# Altium PCB H_BRIDGE_Driver.PcbDoc
Units mm, origin at the board's own origin, x right, y up, seen from the top; angles counter-clockwise.
Board outline 92 x 91 mm, 2 copper layers (Top Layer, Bottom Layer); 21 components, 13 nets, 61 pads, 188 vias.
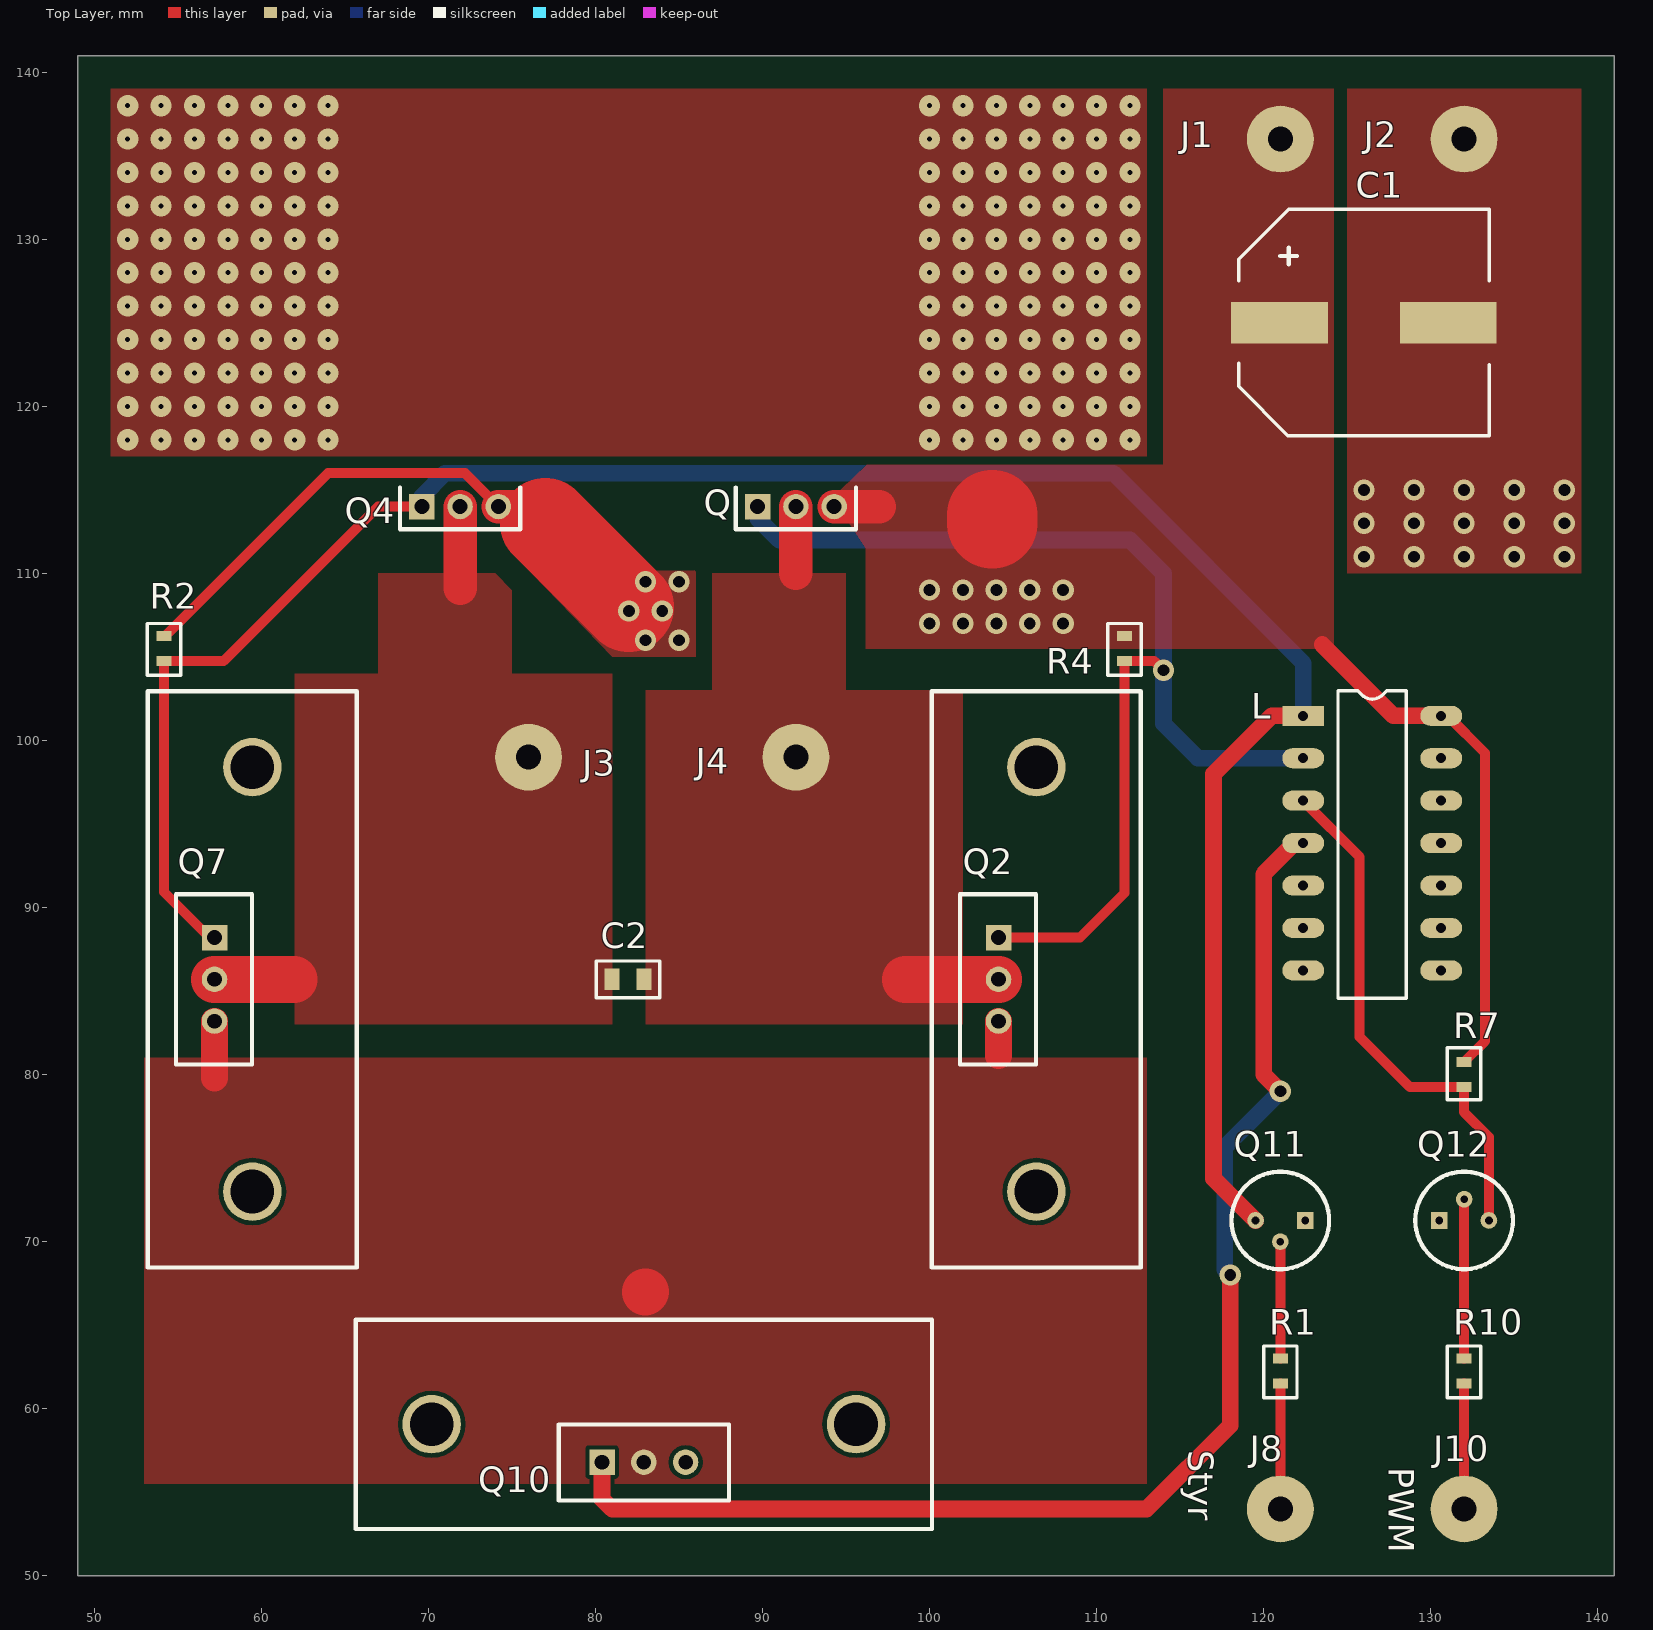
[diagram p0: Top Layer view]
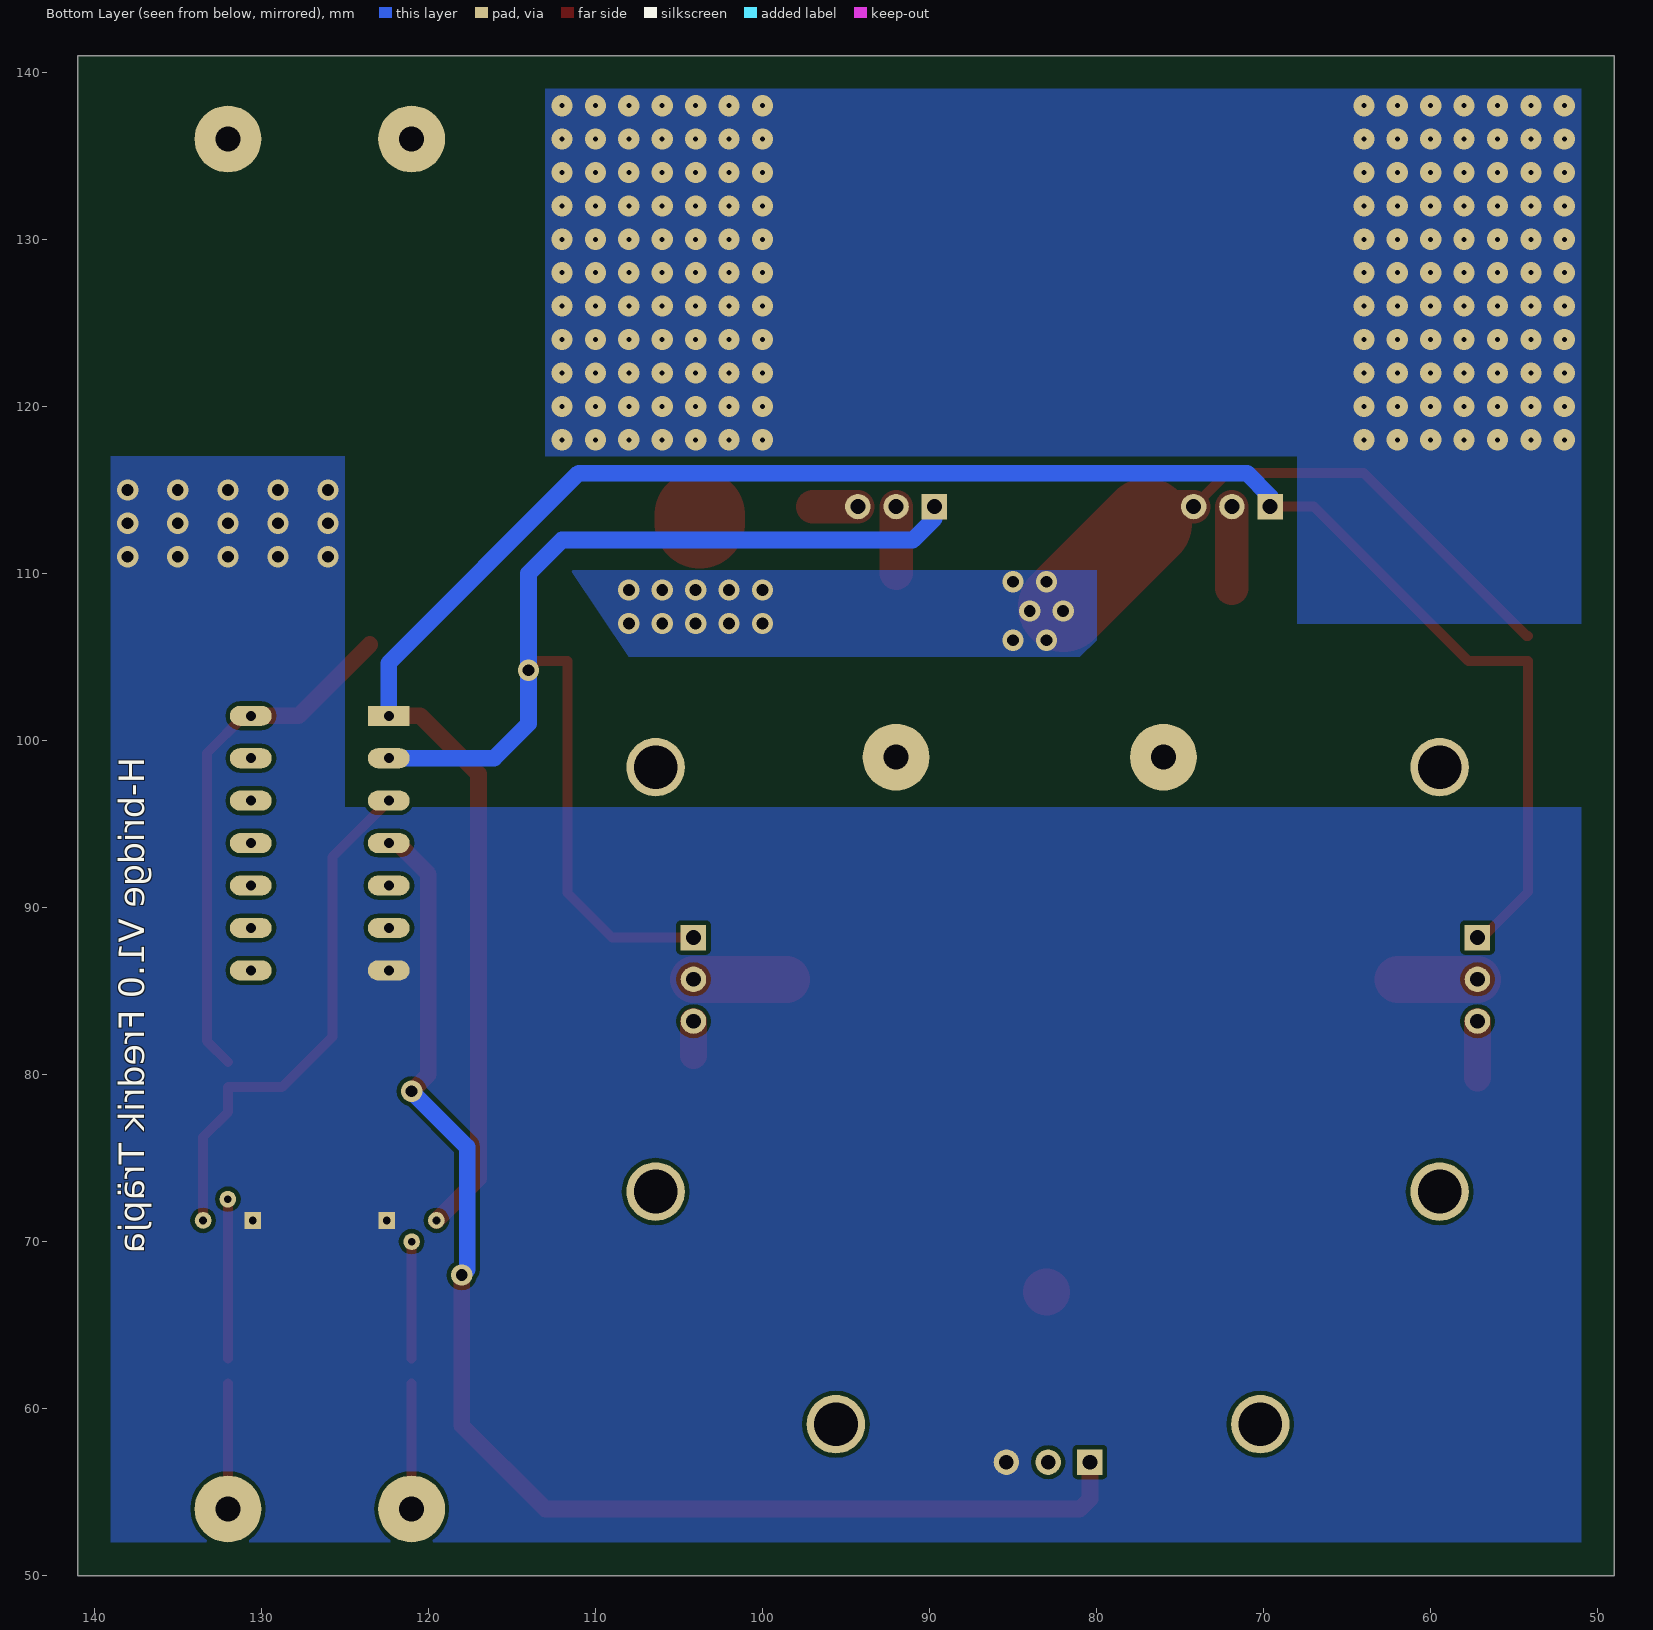
[diagram p1: Bottom Layer view, seen from below]
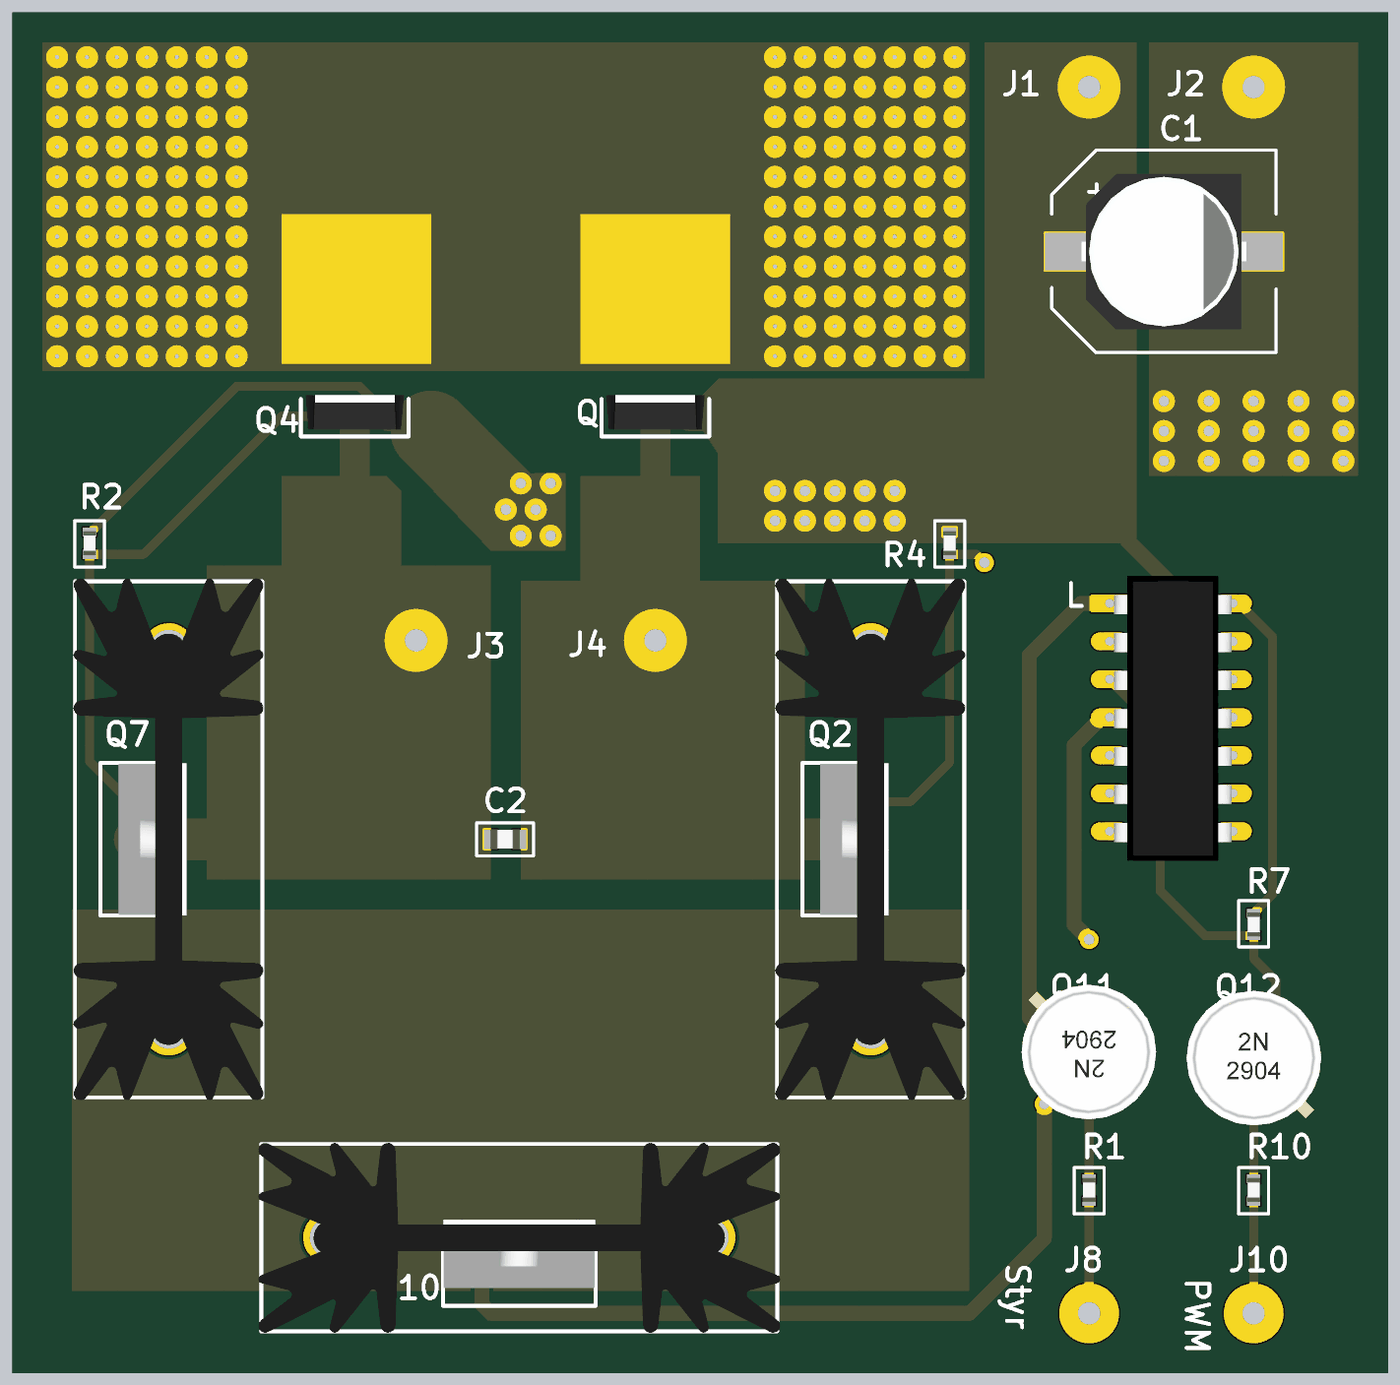
[diagram p2: 3D render of the assembled board from above, using the file's embedded part models]

## Layer stack, top to bottom
Top Solder: solder mask 0.0102, Solder Resist, Dk 3.5
Top Layer: signal copper 0.0356
Dielectric 1: dielectric 0.32, FR-4, Dk 4.8
Bottom Layer: signal copper 0.0356
Bottom Solder: solder mask 0.0102, Solder Resist, Dk 3.5

## Board outline
49,50 141,50 141,141 49,141

## Design rules (kind name [scope] priority, off if disabled: settings)
Clearance [All] p1: gap=0.254 ignorepadtopadclearanceinfootprint=FALSE except(0: Arc-Hole Track-Hole SMDPad-Hole THPad-Hole Via-Hole Fill-Hole Poly-Hole Region-Hole Text-Hole)
HoleSize [All] p1: absolutevalues=TRUE maxlimit=6 minlimit=0.3 maxpercent=80.000 minpercent=20.000
PlaneConnect [All] p1: planeconnectstyle=Direct reliefexpansion=0.508 reliefentries=4 reliefconductorwidth=0.254 reliefairgap=0.254
PolygonConnect [All] p1: connectstyle=Direct reliefconductorwidth=0.254 reliefentries=4 polygonreliefangle="90 Angle" airgapwidth=0.254
RoutingVias [All] p1: holewidth=0.711 width=1.27 viastyle="Through Hole" minholewidth=0.711 minwidth=1.27 maxholewidth=0.711 maxwidth=1.27
SolderMaskExpansion [All] p1: expansion=0.102
Width [All] p1: maxlimit=10 minlimit=0.254 preferedwidth=0.254
28 further rules are at their usual default settings.

## Components (designator, comment, footprint, x,y, rotation, side; value= is the part's Value field where it differs from the comment)
C1 "1000uFSMD" SMDaliminium-elektrolyt 126,125 r0 top locked
C2 "1uFSMD" C0805 81.95,85.7 r0 top locked
J1 "Pad" PAD_WITH_HOLE_4MMx1.5MM 121,136 r0 top
J2 "Pad" PAD_WITH_HOLE_4MMx1.5MM 132,136 r0 top
J3 "Pad" PAD_WITH_HOLE_4MMx1.5MM 76,99 r0 top
J4 "Pad" PAD_WITH_HOLE_4MMx1.5MM 92,99 r0 top
J8 "Pad" PAD_WITH_HOLE_4MMx1.5MM 121,54 r0 top
J10 "Pad" PAD_WITH_HOLE_4MMx1.5MM 132,54 r0 top
L "INV_HEX" DIP14 122.37,101.477 r0 top locked
Q "FQU11P06" I-PAK 92,114 r90 top locked
Q2 "IRF630" TO-220WithHeatSink 104.13,88.2 r0 top locked
Q4 "FQU11P06" I-PAK 71.9,114 r90 top locked
Q7 "IRF630" TO-220WithHeatSink 57.2,88.2 r0 top locked
Q10 "IRF630" TO-220WithHeatSink 80.4,56.8 r90 top locked
Q11 "2N2222" BJT2N2222 121,70 r180 top locked
Q12 "2N2222" BJT2N2222 132,72.54 r0 top locked
R1 "2.2Kohm0603" R0603 121,62.25 r90 top locked
R2 "10Kohm0603" R0603 54.173,105.5 r90 top locked
R4 "10Kohm0603" R0603 111.677,105.5 r90 top locked
R7 "10Kohm0603" R0603 132,80 r270 top
R10 "2.2Kohm0603" R0603 132,62.25 r90 top locked

## Footprints (in the part's own frame and the unit in brackets; to place one, negate y for a bottom-side part, rotate by r counter-clockwise, add the part's x,y. Pads: shape width x height; smd on the part's side, far side on the other; paste and mask are expansions set on the pad)
BJT2N2222 [mm]
  rect 1x1 hole 0.46: 1(-1.485,-1.27)
  round 1 hole 0.46: 2(0,0) 3(1.485,-1.27)
  silkscreen extent -2.92,-4.19 2.92,1.65, body extent -4.49,-5.97 4.51,3.03, height 6.5
C0805 [mm]
  rect 0.9x1.3 smd: 1(-0.95,0) 2(0.95,0)
  silkscreen extent -1.9,-1.1 1.9,1.1, body extent -1,-0.65 1,0.66, height 0.73
DIP14 [mm]
  rect 2.5x1.2 hole 0.6: 1(0,0)
  oval 2.5x1.2 hole 0.6: 2(0,-2.54) 3(0,-5.08) 4(0,-7.62) 5(0,-10.16) 6(0,-12.7) 7(0,-15.24) 8(8.26,-15.24) 9(8.26,-12.7) 10(8.26,-10.16) 11(8.26,-7.62) 12(8.26,-5.08) 13(8.26,-2.54) 14(8.26,0)
  silkscreen extent 2.08,-16.9 6.18,1.5, body extent 0.3,-17.22 8.17,1.82, height 4.19
I-PAK [mil]
  rect 60x60 hole 35.04: 1(0,90.16)
  round 60 hole 35.04: 2(0,0) 3(0,-90.16)
  silkscreen extent -54,-142 45,142, body extent -35,-130 55,130, height 372
PAD_WITH_HOLE_4MMx1.5MM [mm]
  round 4 hole 1.5: 1(0,0)
R0603 [mm]
  rect 0.6x0.9 smd: 1(-0.75,0) 2(0.75,0)
  silkscreen extent -1.6,-1 1.5,1, body extent -0.8,-0.43 0.8,0.43, height 0.48
SMDaliminium-elektrolyt [mm]
  rect 5.8x2.5 smd: 1(-5.05,0) 2(5.05,0)
  silkscreen extent -7.5,-6.75 7.5,6.8, body extent -5.5,-5.2 5.5,5.2, height 10.41
TO-220WithHeatSink [mm]
  rect 1.524x1.524 hole 0.88: 1(0,0)
  round 1.524 hole 0.88: 2(0,-2.5) 3(0,-5)
  round 3.5 hole 2.61: 4(2.27,-15.2) 4(2.27,10.2)
  silkscreen extent -4,-19.75 8.52,14.75, body extent -4.1,-19.95 8.6,14.95, height 25.4

## Part data
C1: library part 865060462010, "WURTH ELEKTRONIK         865060462010             SMD Aluminium Electrolytic Capacitor, Radial Can - SMD, 1000 F, 25 V, WCAP-ASLL Series", Capacitance=1000µF, ESR (Equivalent Series Resistance)=-, Lifetime @ Temp.="5000 Hrs @ 105°C", Manufacturer="Würth Elektronik (Wuerth Elektronik)", Operating Temperature="-55°C ~ 105°C", Package / Case="Radial, Can - SMD", Ripple Current="1.15A @ 100kHz", Standard Package=200, Supplier Part Number 1=2466212RL, Tolerance=±20%, Voltage Rating=25V, Applications="General Purpose", Category=Capacitors, ComponentLink1Description=http://www.farnell.com/datasheets/1880055.pdf, ComponentLink1URL=http://www.farnell.com/datasheets/1880055.pdf, ComponentLink2Description=http://katalog.we-online.de/pbs/datasheet/865060462010.pdf, ComponentLink2URL=http://katalog.we-online.de/pbs/datasheet/865060462010.pdf, Family="Aluminum Capacitors", Height - Seated (Max)="0.551\" (14.00mm)", Impedance="66 mOhm", Lead Spacing=-, Manufacturer Part Number=865060462010, Mounting Type="Surface Mount", Online Catalog="WCAP-ASLL Series", Other Names=732-8539-2, Packaging="Tape &amp; Reel (TR)", Polarization=Polar, Pricing 1="1=1.79, 3=1.63, 5=1.5, 10=1.3, 20=1.11, 50=0.964, 250=0.767, 500=0.683 (EUR)", Series=WCAP-ASLL, Size / Dimension="0.492\" Dia (12.50mm)", Stock 1=240, Supplier 1=Farnell, Surface Mount Land Size="0.531\" L x 0.531\" W (13.50mm x 13.50mm)"
C2: library part 0805F105Z250CT, "Cap Ceramic 1uF 25V Y5V -20% to 80% SMD 0805 85C Plastic T/R", Capacitance="1000000 pF", Case Style="Ceramic Chip", Manufacturer="Walsin Technologies", Operating Temp Range="-25C to 85C", Package / Case=0805, Supplier Part Number 1=2496996, Temp Coeff (Dielectric)=Y5V, Tolerance (+ or -)="-20% to 80%", Voltage=25VDC, ComponentLink1Description=https://datasheet.ciiva.com/26831/getdatasheetpartid-747373-26831419.pdf, ComponentLink1URL=https://datasheet.ciiva.com/26831/getdatasheetpartid-747373-26831419.pdf, Construction="SMT Chip", Failure Rate="Not Required", Manufacturer Part Number=0805F105Z250CT, Mounting Style="Surface Mount", Packaging="Tape and Reel", Pricing 1="10=0.0398, 100=0.0282, 250=0.0175, 750=0.0146, 1500=0.0109 (GBP)", Product Depth (mm)="1.25 mm", Product Diameter (mm)="Not Required mm", Product Height (mm)="1.25 mm", Product Length (mm)="2 mm", Rad Hardened=No, Stock 1=81660, Supplier 1=Farnell, Wire Form="Not Required"
J1 J2 J3 J4 J8 J10: library part Hole
L: library part CD40106BE, "IC, HEX INVERTER, 4000 CMOS, 16DIP", Manufacturer="Texas Instruments (TI)", Maximum High Level Output Current="-4.2(Min) mA", Maximum Low Level Output Current="4.2(Min) mA", Operating Temperature="-55 to 125 °C", Package=14PDIP, Supplier Part Number 1=1106097, Typical Operating Supply Voltage="3.3|5|9|12|15 V", Typical Quiescent Current="0.04 uA", Category="Inverter Schmitt Trigger", ComponentLink1Description=https://datasheet.ciiva.com/31393/83-0482-v1-31393479.pdf, ComponentLink1URL=https://datasheet.ciiva.com/31393/83-0482-v1-31393479.pdf, ComponentLink2Description=https://datasheet.ciiva.com/14134/cd40106b-eng-tds-14134554.pdf, ComponentLink2URL=https://datasheet.ciiva.com/14134/cd40106b-eng-tds-14134554.pdf, ComponentLink3Description=https://datasheet.ciiva.com/15089/getdatasheetpartid-83071-15089178.pdf, ComponentLink3URL=https://datasheet.ciiva.com/15089/getdatasheetpartid-83071-15089178.pdf, ComponentLink4Description=https://datasheet.ciiva.com/27050/893179-27050663.pdf, ComponentLink4URL=https://datasheet.ciiva.com/27050/893179-27050663.pdf, ComponentLink5Description=https://datasheet.ciiva.com/4827/schs097d-127287-4827216.pdf, ComponentLink5URL=https://datasheet.ciiva.com/4827/schs097d-127287-4827216.pdf, ComponentLink6Description=https://datasheet.ciiva.com/29138/174319-da-01-en-cmos-ic-cd-40106-be-dip14-tid-29138613.pdf, ComponentLink6URL=https://datasheet.ciiva.com/29138/174319-da-01-en-cmos-ic-cd-40106-be-dip14-tid-29138613.pdf, ComponentLink7Description=https://datasheet.ciiva.com/1626/1833362-1626124.pdf, ComponentLink7URL=https://datasheet.ciiva.com/1626/1833362-1626124.pdf, ComponentLink8Description=https://datasheet.ciiva.com/26228/cd40106b-mil-26228764.pdf, ComponentLink8URL=https://datasheet.ciiva.com/26228/cd40106b-mil-26228764.pdf, ComponentLink9Description=https://datasheet.ciiva.com/1508/1707951-1508125.pdf, ComponentLink9URL=https://datasheet.ciiva.com/1508/1707951-1508125.pdf, ComponentLink10Description=https://datasheet.ciiva.com/7783/1833362-7783095.pdf, ComponentLink10URL=https://datasheet.ciiva.com/7783/1833362-7783095.pdf, ComponentLink11Description=https://datasheet.ciiva.com/14290/cd40106b-mil-14290377.pdf, ComponentLink11URL=https://datasheet.ciiva.com/14290/cd40106b-mil-14290377.pdf, ComponentLink12Description=https://datasheet.ciiva.com/1866/cd40106b-1866363.pdf, ComponentLink12URL=https://datasheet.ciiva.com/1866/cd40106b-1866363.pdf, Fabrication Technology=CMOS, Input Type="Schmitt Trigger", Logic Family=CD4000, Logic Function="Inverter Schmitt Trigger", Manufacturer Part Number=CD40106BE, Maximum Propagation Delay Time @ Maximum CL="280@5V|140@10V|120@15V ns", Number of Elements per Chip=6, Output Type="Schmitt Trigger", Packaging="Rail / Tube", Pricing 1="1=0.49, 10=0.405, 100=0.22, 250=0.218, 500=0.217, 900=0.146, 3000=0.143, 9000=0.131 (EUR)", Propagation Delay Test Condition="50 pF", Rad Hard=No, Stock 1=22628, Supplier 1=Farnell
Q Q4: "FAIRCHILD SEMICONDUCTOR         FQU11P06            MOSFET Transistor, P Channel, 9.4 A, 60 V, 185 mohm, -10 V, -4 V", Continuous drain current=9.4A, Drain to Source on-state resistance=185@10VmOhm, Drain to Source voltage=60V, Manufacturer="Fairchild Semiconductor", Package=IPAK, Supplier Part Number 1=9846166, ComponentLink1Description=http://www.farnell.com/datasheets/1796811.pdf, ComponentLink1URL=http://www.farnell.com/datasheets/1796811.pdf, Field-effect transistor type=Enhancement, Manufacturer Part Number=FQU11P06, Pricing 1="1=0.814, 25=0.698, 100=0.548 (EUR)", Stock 1=3144, Supplier 1=Farnell
Q2 Q7 Q10: "MOSFET N-CH 200V 9A TO-220", Alternate Case Style=SOT-78B, Capacitance Ciss Typ=540pF, Continuous Drain Current Id=9A, Current Temperature=25°C, Drain Source Voltage Vds=200V, Manufacturer=STMicroelectronics, On Resistance Rds(on)=400mohm, Operating Temperature Max=150°C, Operating Temperature Min=-65°C, Operating Temperature Range="-65°C to +150°C", Package / Case=TO-220, Power Dissipation Pd=100W, Pulse Current Idm=36A, Rds(on) Test Voltage Vgs=10V, Supplier Part Number 1=2144993, Threshold Voltage Vgs Typ=3V, Voltage Vgs th Max=4V, Voltage Vgs th Min=2V, ComponentLink1Description=https://datasheet.ciiva.com/27746/47-0290-27746871.pdf, ComponentLink1URL=https://datasheet.ciiva.com/27746/47-0290-27746871.pdf, ComponentLink2Description=https://datasheet.ciiva.com/29324/155772-da-01-en-mosfet-irf630-stm-29324203.pdf, ComponentLink2URL=https://datasheet.ciiva.com/29324/155772-da-01-en-mosfet-irf630-stm-29324203.pdf, ComponentLink3Description=https://datasheet.ciiva.com/15193/getdatasheetpartid-84724-15193131.pdf, ComponentLink3URL=https://datasheet.ciiva.com/15193/getdatasheetpartid-84724-15193131.pdf, ComponentLink4Description=https://datasheet.ciiva.com/16290/cd00000701-16290285.pdf, ComponentLink4URL=https://datasheet.ciiva.com/16290/cd00000701-16290285.pdf, ComponentLink5Description=https://datasheet.ciiva.com/938/cd00000701-938548.pdf, ComponentLink5URL=https://datasheet.ciiva.com/938/cd00000701-938548.pdf, ComponentLink6Description=https://datasheet.ciiva.com/7643/1689784-7643063.pdf, ComponentLink6URL=https://datasheet.ciiva.com/7643/1689784-7643063.pdf, ComponentLink7Description=https://datasheet.ciiva.com/46382/1689784-46382250.pdf, ComponentLink7URL=https://datasheet.ciiva.com/46382/1689784-46382250.pdf, Current Id Max=9A, Full Power Rating Temperature=25°C, Lead Spacing=2.54mm, Manufacturer Part Number=IRF630, MSL="(Not Applicable)", No. of Pins=3, No. of Transistors=1, On State resistance @ Vgs = 10V=400mohm, Pin Configuration=a, Pin Format="1G, (2+Tab)D, 3S", Pricing 1="1=1.17, 10=0.95, 100=0.73, 500=0.65, 1000=0.51, 5000=0.49 (EUR)", Reverse Recovery Time trr Typ=170ns, Stock 1=245, Supplier 1=Farnell, SVHC="No SVHC (19-Dec-2012)", Transistor Case Style=TO-220, Transistor Polarity="N Channel", Voltage Vds Typ=200V, Voltage Vgs Max=3V, Voltage Vgs Rds on Measurement=10V
Q11 Q12: "MULTICOMP         2N2222             Bipolar (BJT) Single Transistor, NPN, 30 V, 500 mW, 800 mA, 100 hFE", Collector Emitter Voltage V(br)ceo=30V, Collector Emitter Voltage Vces=400mV, Continuous Collector Current Ic Max=800mA, Current Ic @ Vce Sat=150mA, DC Current Gain hFE=100, Full Power Rating Temperature=25°C, Manufacturer=Multicomp, Package / Case=TO-18, Power Dissipation Pd=500mW, Supplier Part Number 1=9206884, Voltage Vcbo=60V, ComponentLink1Description=https://datasheet.ciiva.com/1400/1524377-1400202.pdf, ComponentLink1URL=https://datasheet.ciiva.com/1400/1524377-1400202.pdf, ComponentLink2Description=https://datasheet.ciiva.com/1259/296640-1259843.pdf, ComponentLink2URL=https://datasheet.ciiva.com/1259/296640-1259843.pdf, ComponentLink3Description=https://datasheet.ciiva.com/1194/1662272-1194081.pdf, ComponentLink3URL=https://datasheet.ciiva.com/1194/1662272-1194081.pdf, Current Ic Continuous a Max=800mA, Current Ic hFE=150mA, DC Collector Current=800mA, Gain Bandwidth ft Min=250MHz, Gain Bandwidth ft Typ=250MHz, Hfe Min=100, Manufacturer Part Number=2N2222, No. of Pins=3, No. of Transistors=1, Pin Configuration=a, Power Dissipation Ptot Max=500mW, Pricing 1="1=1.45, 25=0.795, 100=0.737, 500=0.293, 1000=0.214, 2000=0.189, 7000=0.187, 20000=0.185 (EUR)", Stock 1=79208, Supplier 1=Farnell, SVHC="No SVHC (19-Dec-2012)", Transistor Case Style=TO-18, Transistor Polarity=NPN
R1 R10: library part RC0603FR-072K2L, "RES SMD 2.2K OHM 1% 1/10W 0603", Case Code - in=0603, Case Code - mm=1608, Manufacturer=Yageo, Operating Temperature Range="- 55 C to + 155 C", Power Rating="100 mW", Resistance="2.2 kOhms", Supplier Part Number 1=9238522, Temperature Coefficient="100 PPM / C", Tolerance="1 %", Voltage Rating="50 V", ComponentLink1Description=https://datasheet.ciiva.com/7746/1738695-7746315.pdf, ComponentLink1URL=https://datasheet.ciiva.com/7746/1738695-7746315.pdf, ComponentLink2Description=https://datasheet.ciiva.com/2453/pyu-r-int-thick-7-2453945.pdf, ComponentLink2URL=https://datasheet.ciiva.com/2453/pyu-r-int-thick-7-2453945.pdf, ComponentLink3Description=https://datasheet.ciiva.com/46394/443971-46394958.pdf, ComponentLink3URL=https://datasheet.ciiva.com/46394/443971-46394958.pdf, ComponentLink4Description=https://datasheet.ciiva.com/7746/1738695-7746316.pdf, ComponentLink4URL=https://datasheet.ciiva.com/7746/1738695-7746316.pdf, ComponentLink5Description=https://datasheet.ciiva.com/2453/pyu-r-int-thick-7-2453943.pdf, ComponentLink5URL=https://datasheet.ciiva.com/2453/pyu-r-int-thick-7-2453943.pdf, ComponentLink6Description=https://datasheet.ciiva.com/46440/1868787-46440902.pdf, ComponentLink6URL=https://datasheet.ciiva.com/46440/1868787-46440902.pdf, ComponentLink7Description=https://datasheet.ciiva.com/2453/pyu-r-int-thick-7-2453944.pdf, ComponentLink7URL=https://datasheet.ciiva.com/2453/pyu-r-int-thick-7-2453944.pdf, ComponentLink8Description=https://datasheet.ciiva.com/7660/1868787-7660791.pdf, ComponentLink8URL=https://datasheet.ciiva.com/7660/1868787-7660791.pdf, Manufacturer Part Number=RC0603FR-072K2L, Packaging=Reel, Pricing 1="10=0.0079, 300=0.0068, 500=0.0059, 1250=0.0048, 2500=0.004 (EUR)", Product="Thick Film Resistors General Purpose", Series=RC, Stock 1=73325, Supplier 1=Farnell, Termination Style=SMD/SMT
R2 R4 R7: library part RC0603FR-0710KL, "YAGEO         RC0603FR-0710KL             RES, THICK FILM, 10K, 1%, 0.1W, 0603", Case Code - in=0603, Case Code - mm=1608, Manufacturer=Yageo, Operating Temperature Range="- 55 C to + 155 C", Package / Case="0603 (1608 metric)", Power Rating="100 mW", Resistance="10 kOhms", Supplier Part Number 1=9238603, Temperature Coefficient="100 PPM / C", Tolerance="1 %", Voltage Rating="75 V", Brand=Yageo, ComponentLink1Description=https://datasheet.ciiva.com/7983/443971-7983596.pdf, ComponentLink1URL=https://datasheet.ciiva.com/7983/443971-7983596.pdf, ComponentLink2Description=https://datasheet.ciiva.com/7746/1738695-7746239.pdf, ComponentLink2URL=https://datasheet.ciiva.com/7746/1738695-7746239.pdf, ComponentLink3Description=https://datasheet.ciiva.com/22747/443971-22747519.pdf, ComponentLink3URL=https://datasheet.ciiva.com/22747/443971-22747519.pdf, ComponentLink4Description=https://datasheet.ciiva.com/7660/38590-7660789.pdf, ComponentLink4URL=https://datasheet.ciiva.com/7660/38590-7660789.pdf, ComponentLink5Description=https://datasheet.ciiva.com/15189/getdatasheetpartid-409289-15189591.pdf, ComponentLink5URL=https://datasheet.ciiva.com/15189/getdatasheetpartid-409289-15189591.pdf, ComponentLink6Description=https://datasheet.ciiva.com/46440/1868787-46440891.pdf, ComponentLink6URL=https://datasheet.ciiva.com/46440/1868787-46440891.pdf, Height="0.45 mm", Length="1.6 mm", Manufacturer Part Number=RC0603FR-0710KL, Packaging=Reel, Pricing 1="10=0.0082, 300=0.007, 500=0.0061, 1250=0.0049, 2500=0.0041 (EUR)", Product="Thick Film Resistors General Purpose", Product Category="Thick Film Resistors", RoHS=True, Series=RC, Stock 1=328031, Supplier 1=Farnell, Termination Style=SMD/SMT, Type="General Purpose Chip Resistor Surface Mount", Unit Weight="0.000071 oz", Width="0.8 mm"

## Via types
v1: diameter 1.27, hole 0.3, Top Layer to Bottom Layer, 154 vias
v2: diameter 1.27, hole 0.711, Top Layer to Bottom Layer, 34 vias

## Nets (pads, with @x,y where several pads share a name; then routed paths per layer and width w, separated by ;. In a path a pad name is that pad's centre, name@x,y a point inside that pad or via, vN(x,y) a via of type N, cw(c..) or ccw(c..) an arc to the next point about the centre after c; other vN are vias at no path point)
GND: C1.2 J2.1 L.7 Q10.3 Q11.1 Q12.1 | length 1.8
  Bottom Layer w0.254: L.7@122.485,86.122 L.7 L.7@122.737,86.237 ; J2.1@131.1,135.1 J2.1
  other v2: 126,111 129,111 132,111 135,111 138,111 126,113 129,113 132,113 135,113 138,113 126,115 129,115 132,115 135,115 138,115
INV1: L.1 Q4.1 Q7.1 Q11.3 R2.1 | length 133.6
  Top Layer w0.6: Q7.1 56.9,88.2 54.173,90.927 R2.1 57.75,104.75 67,114 Q4.1
  Top Layer w1: Q11.3 117,73.785 117,98 120.477,101.477 L.1
  Bottom Layer w1: Q4.1 69.61,114.61 71,116 111,116 122.37,104.63 L.1
INV2: L.3 Q12.3 R7.2 | length 31.6
  Top Layer w0.6: L.3 125.75,93.017 125.75,82.25 128.75,79.25 R7.2 132,77.75 133.485,76.265 Q12.3
NetC2_1: C2.1 J3.1 Q4.2 Q7.2 | length 9.6
  Top Layer w2: 71.9,109.1 Q4.2
  Top Layer w2.8: Q7.2 61.95,85.7
NetC2_2: C2.2 J4.1 Q2.2 Q.2 | length 9.6
  Top Layer w2: 92,110 Q.2
  Top Layer w2.8: 98.55,85.7 Q2.2
NetJ8_1: J8.1 R1.1 | length 7.5
  Top Layer w0.6: J8.1 R1.1
NetJ10_1: J10.1 R10.1 | length 7.5
  Top Layer w0.6: J10.1 R10.1
NetL_2: L.2 Q2.1 Q.1 R4.1 | length 69.6
  Top Layer w0.6: Q2.1 109,88.2 111.677,90.877 R4.1 113.45,104.75 v2@113.95,104.25
  Bottom Layer w1: Q.1 89.71,113.29 91,112 112,112 114,110 v2(114,104.2) 114,101 116.063,98.937 L.2
NetL_4: L.4 Q10.1 | length 80.2
  Top Layer w1: Q10.1 80.4,54.6 81,54 113,54 118,59 v2(118,68) ; v2(121,79) 120,80 120,92 121.857,93.857 L.4
  Bottom Layer w1: v2(118,68) 117.675,68.325 117.675,75.675 v2(121,79)
NetQ2_3: Q2.3 Q7.3 Q10.2 | length 5.5
  Top Layer w1.6: 57.2,79.8 Q7.3 ; 104.13,81.13 Q2.3
  Top Layer w2.8: 82.984,66.984 83,67
NetQ11_2: Q11.2 R1.2 | length 7
  Top Layer w0.6: R1.2 Q11.2
NetQ12_2: Q12.2 R10.2 | length 9.5
  Top Layer w0.6: R10.2 Q12.2
VCC12V: C1.1 J1.1 L.14 Q4.3 Q.3 R2.2 R4.2 R7.1 | length 69.8
  Top Layer w0.6: R2.2 54.25,106.25 64,116 72.19,116 Q4.3 ; L.14 131.023,101.477 133.25,99.25 133.25,82 R7.1
  Top Layer w1: 123.5,105.75 127.773,101.477 L.14
  Top Layer w2: Q4.3 76,114 77,113 ; Q.3 97,114
  Top Layer w5.4: 77,113 v2@82,108 ; 103.75,113 103.75,113.5
  other v2: 83,106 85,106 100,107 102,107 104,107 106,107 108,107 82,107.75 84,107.75 100,109 102,109 104,109 106,109 108,109 83,109.5 85,109.5
pads on no net: L.5 L.6 L.8 L.9 L.10 L.11 L.12 L.13 Q2.4 Q7.4 Q10.4
copper on no net:
  other v1: 52,118 54,118 56,118 58,118 60,118 62,118 64,118 100,118 102,118 104,118 106,118 108,118 110,118 112,118 52,120 54,120 56,120 58,120 60,120 62,120 64,120 100,120 102,120 104,120 106,120 108,120 110,120 112,120 52,122 54,122 56,122 58,122 60,122 62,122 64,122 100,122 102,122 104,122 106,122 108,122 110,122 112,122 52,124 54,124 56,124 58,124 60,124 62,124 64,124 100,124 102,124 104,124 106,124 108,124 110,124 112,124 52,126 54,126 56,126 58,126 60,126 62,126 64,126 100,126 102,126 104,126 106,126 108,126 110,126 112,126 52,128 54,128 56,128 58,128 60,128 62,128 64,128 100,128 102,128 104,128 106,128 108,128 110,128 112,128 52,130 54,130 56,130 58,130 60,130 62,130 64,130 100,130 102,130 104,130 106,130 108,130 110,130 112,130 52,132 54,132 56,132 58,132 60,132 62,132 64,132 100,132 102,132 104,132 106,132 108,132 110,132 112,132 52,134 54,134 56,134 58,134 60,134 62,134 64,134 100,134 102,134 104,134 106,134 108,134 110,134 112,134 52,136 54,136 56,136 58,136 60,136 62,136 64,136 100,136 102,136 104,136 106,136 108,136 110,136 112,136 52,138 54,138 56,138 58,138 60,138 62,138 64,138 100,138 102,138 104,138 106,138 108,138 110,138 112,138

## Polygon pours and split planes (outlines as drawn)
no net on Top Solder "Top Layer-No Net" (solid): 87,117.5 97,117.5 97,127.5 87,127.5
no net on Top Solder "Top Layer-No Net" (solid): 67,117.5 77,117.5 77,127.5 67,127.5
NetQ2_3 on Top Layer "NETQ2_3_L01_P048" (solid, pour order 48): 113,81 53,81 53,55.5 113,55.5
no net on Top Layer "Top Layer-No Net" (solid, pour order 0): 51,117 113,117 113,139 51,139
VCC12V on Top Layer "VCC12V_L01_P024" (solid, pour order 24): 81,105 86,105 86,110.2 76.1,110.1
GND on Top Layer "GND_L01_P038" (solid, pour order 38): 139,139 125,139 125,110 139,110
VCC12V on Top Layer "VCC12V_L01_P046" (solid, pour order 46): 96.25,116.5 94.683,115 94.683,113 95.183,113 96.183,111.5 96.183,105.5 124.183,105.5 124.183,139 114,139 114,116.5
NetC2_2 on Top Layer "NETC2_2_L01_P050" (solid, pour order 50): 95,110 87,110 87,103 83,103 83,83 102,83 102,103 95,103
NetC2_1 on Top Layer "NETC2_1_L01_P058" (solid, pour order 58): 62,83 81,83 81,103 81,104 75,104 75,109 74,110 67,110 67,104 62,104
GND on Bottom Layer "GND_L02_P036" (solid, pour order 36): 139,117 125,117 125,96 51,96 51,52 139,52
no net on Bottom Layer "Top Layer-No Net" (solid, pour order 10): 51,107 68,107 68,117 113,117 113,139 51,139
VCC12V on Bottom Layer "VCC12V_L02_P022" (solid, pour order 22): 81,105 80,106 80,110.2 111.5,110.2 108,105

## Silkscreen, mask and mechanical layers (free items; w line width, h text height)
Top Overlay:
  text "Styr" at 115.5,57.516 h1.52 r270
  text "PWM" at 127.5,56.5 h1.52 r270
Bottom Overlay:
  text "H-bridge V1.0 Fredrik Träpja" at 137,99 h1.52 r270
Bottom Solder:
  text "H-bridge V1.0 Fredrik Träpja" at 137,99 h1.52 r270
Board outline:
  lines w0.254: 50,51 51,51 140,51 140,140 50,140 50,51